# EAGLE board bij mekaar roopzol (EAGLE 5.00)
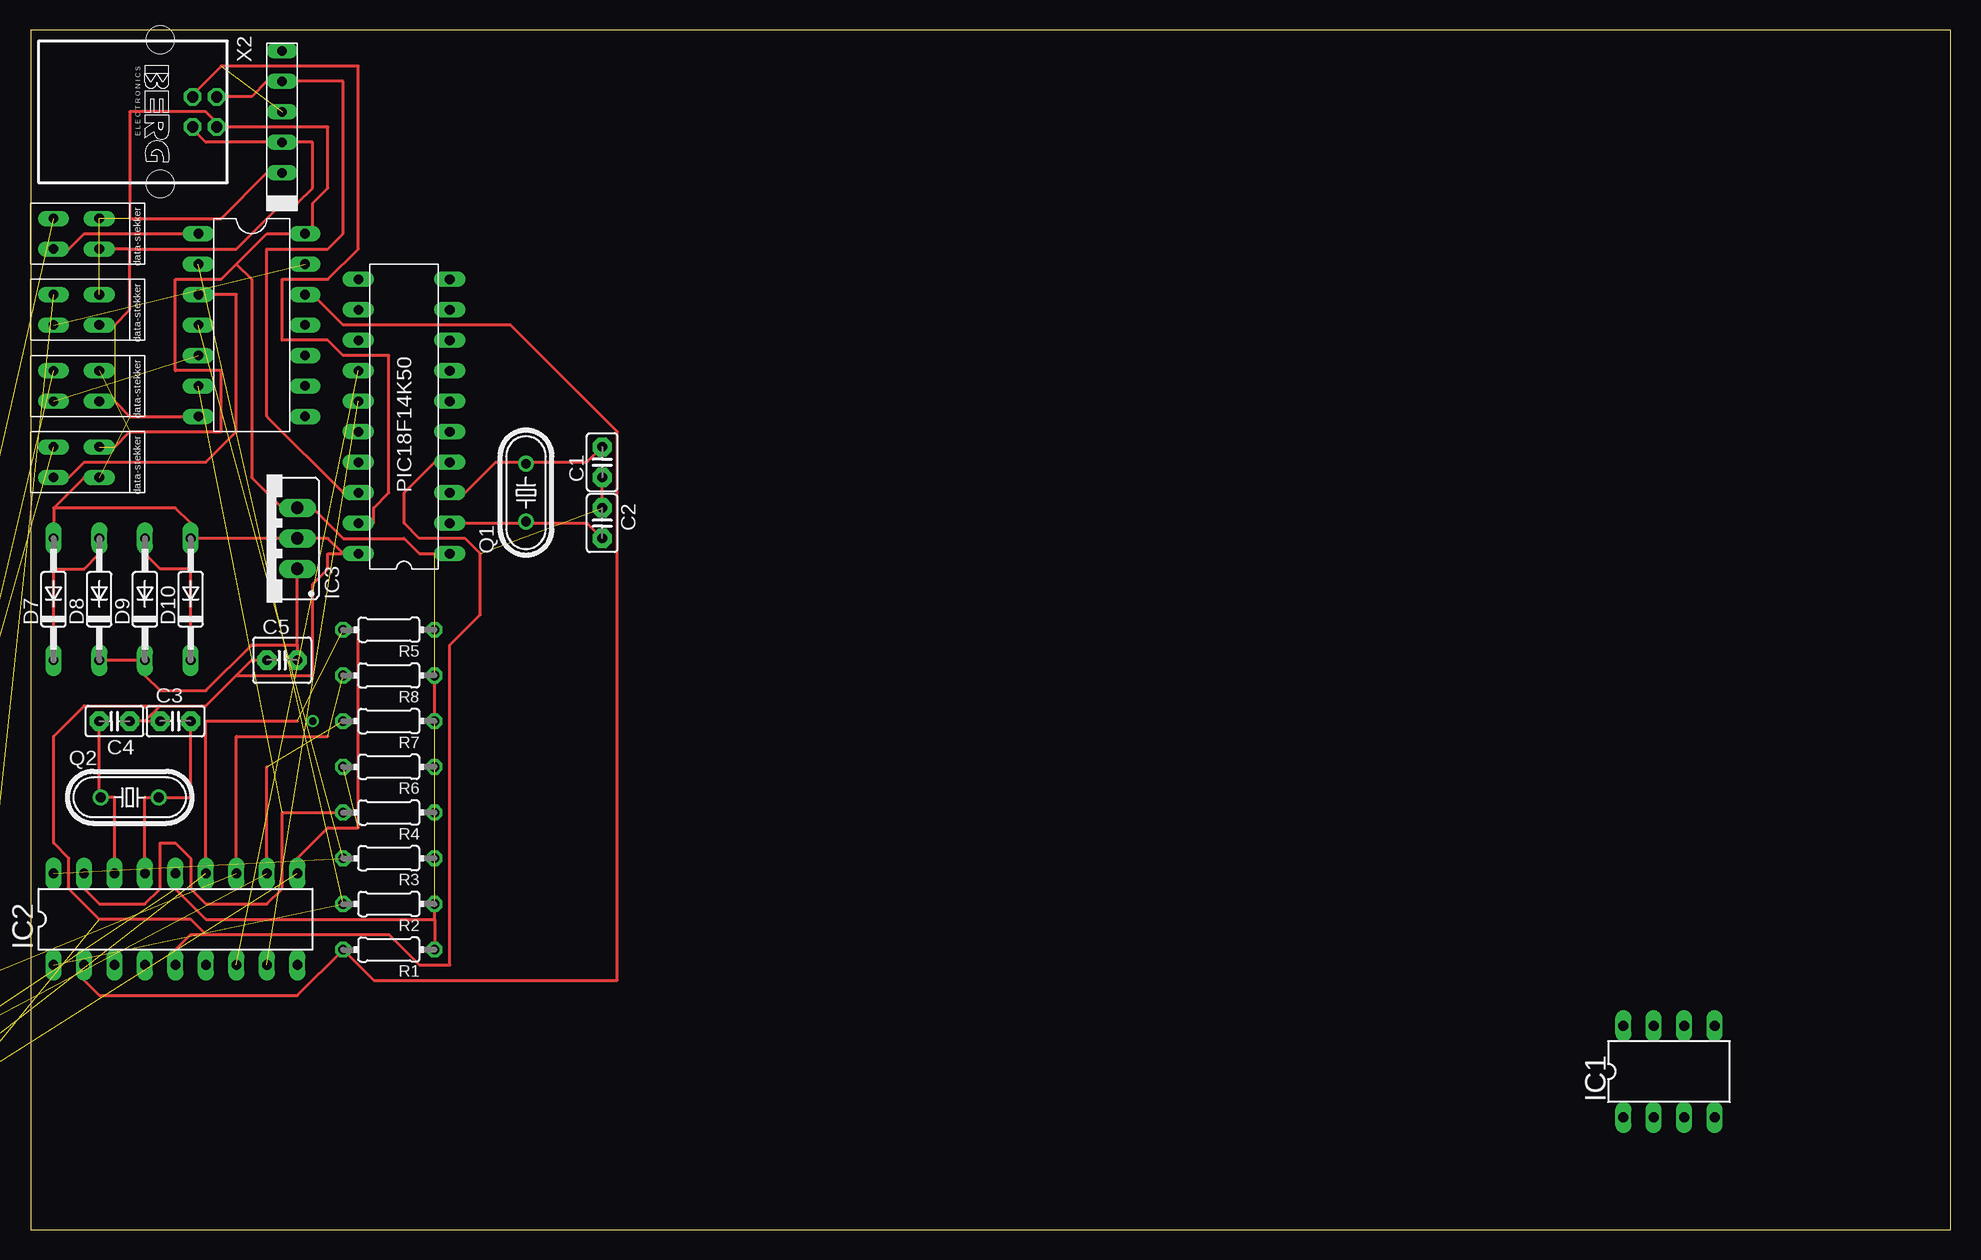
[diagram p0: board, top side]

Size 160 x 100 mm. Coordinates in mm from the lower left corner, seen from the top.
Outline: 0,0 160,0 160,100 0,100 0,0
Copper layers (1*16): Top 0.035mm / dielectric 1.5mm / Bottom 0.035mm
Design rules "default": minimum track width 10mil, minimum drill 24mil, track to track 8mil, track to pad 8mil, pad to pad 8mil, via to via 8mil, smd to smd 8mil, copper to edge 40mil, drill to drill 8mil, minimum pad ring 10mil, minimum via ring 8mil, stop-mask expansion 4mil, vias tented up to drill 0mil, thermal gap 10mil

## Footprints (pad centres in the part's own frame; a part is rotated, then mirrored left to right if it is on the bottom)
C2.5-2 = drill 0.813 pad 1.6 octagon: 1 -1.27,0; 2 1.27,0
C2.5-4 = drill 0.813 pad 1.6 octagon: 1 -1.27,0; 2 1.27,0
DO35-10 = drill 0.813 long: A 5.08,0; C -5.08,0
DIL8 = drill 0.813 long: 1 -3.81,-3.81; 2 -1.27,-3.81; 3 1.27,-3.81; 4 3.81,-3.81; 5 3.81,3.81; 6 1.27,3.81; 7 -1.27,3.81; 8 -3.81,3.81
DIL18 = drill 0.813 long: 1 -10.16,-3.81; 2 -7.62,-3.81; 3 -5.08,-3.81; 4 -2.54,-3.81; 5 0,-3.81; 6 2.54,-3.81; 7 5.08,-3.81; 8 7.62,-3.81; 9 10.16,-3.81; 10 10.16,3.81; 11 7.62,3.81; 12 5.08,3.81; 13 2.54,3.81; 14 0,3.81; 15 -2.54,3.81; 16 -5.08,3.81; 17 -7.62,3.81; 18 -10.16,3.81
78XXS = drill 1.016 long: GND 0,-2.54; IN -2.54,-2.54; OUT 2.54,-2.54
HC49/S = drill 0.813 round: 1 -2.413,0; 2 2.413,0
0204/7 = drill 0.813 octagon: 1 -3.81,0; 2 3.81,0
E.18F14K50 = drill 0.8 long: RA0/D+/PGD -7.62,3.81; RA1/D-/PGC -5.08,3.81; RA3/MCLR/VPP -2.54,-3.81; RA4/AN3/OSC2/CLKOUT -5.08,-3.81; RA5/OSC1/CLKIN -7.62,-3.81; RB4/AN10/SDI/SDA 7.62,3.81; RB5/AN11/RX/DT 10.16,3.81; RB6/SCK/SCL 12.7,3.81; RB7/TX/CK 12.7,-3.81; RC0/AN4/C12IN+/INT0/VREF+ 0,3.81; RC1/AN5/C12IN1-/INT1/VREF 2.54,3.81; RC2/AN6/P1D/C12IN2-/CVREF/INT2 5.08,3.81; RC3/AN7/P1C/C12IN3-/PGM 5.08,-3.81; RC4/P1B/C12OUT/SRQ 2.54,-3.81; RC5/CCP1/P1A/T0CKI 0,-3.81; RC6/AN8/SS/T13CKI/T1OSCI 7.62,-3.81; RC7/AN9/SDO/T1OSCO 10.16,-3.81; VDD -10.16,-3.81; VSS -10.16,3.81; VUSB -2.54,3.81
P.1.PICKIT-CONNECTOR = drill 0.8 long: 1 0,6.35; 2 0,3.81; 3 0,1.27; 4 0,-1.27; 5 0,-3.81; 6 0,-6.35
P-DIP = drill 0.8 long: RX -3.81,1.27; TX -3.81,-1.27; VDD 0,1.27; VSS 0,-1.27
P-DIP' = drill 0.8 long: 1A -5.715,7.62; 1Y -5.715,5.08; 2A -5.715,2.54; 2Y -5.715,0; 3A -5.715,-2.54; 3Y -5.715,-5.08; 4A 3.175,-5.08; 4Y 3.175,-7.62; 5A 3.175,0; 5Y 3.175,-2.54; 6A 3.175,5.08; 6Y 3.175,2.54; GND -5.715,-7.62; VCC 3.175,7.62
PN61729 = drill 0.95 octagon: 1 1.25,4.71; 2 -1.25,4.71; 3 -1.25,2.71; 4 1.25,2.71 | hole 2.3: -6.02,0; 6.02,0

## Placement (x,y rotation side)
C1  [C2.5-2]  47.62,63.97 90 top
C2  [C2.5-2]  47.62,58.89 270 top
C3  [C2.5-2]  12.06,42.38 0 top
C4  [C2.5-2]  6.98,42.38 180 top
C5  [C2.5-4]  20.95,47.46 0 top
D7  BA243A  [DO35-10]  1.9,52.54 90 top
D8  BA243A  [DO35-10]  5.71,52.54 90 top
D9  BA243A  [DO35-10]  9.52,52.54 90 top
D10  BA243A  [DO35-10]  13.33,52.54 90 top
IC1  PIC12F629P  [DIL8]  136.52,13.17 0 top
IC2  PIC16F628P  [DIL18]  12.06,25.87 0 top
IC3  [78XXS]  19.68,57.62 90 top
Q1  [HC49/S]  41.27,61.43 90 top
Q2  [HC49/S]  8.25,36.03 0 top
R1  [0204/7]  29.84,23.33 180 top
R2  [0204/7]  29.84,27.14 180 top
R3  [0204/7]  29.84,30.95 180 top
R4  [0204/7]  29.84,34.76 180 top
R5  [0204/7]  29.84,50 180 top
R6  [0204/7]  29.84,38.57 180 top
R7  [0204/7]  29.84,42.38 180 top
R8  [0204/7]  29.84,46.19 180 top
U$1  D.2.18F14K50  [E.18F14K50]  31.11,66.51 90 top
U$2  D.1.PICKIT-2-CONNECTOR  [P.1.PICKIT-CONNECTOR]  20.95,91.91 180 top
U$3  DATA-STEKKER  [P-DIP]  5.71,83.02 0 top
U$4  DATA-STEKKER  [P-DIP]  5.71,76.67 0 top
U$5  DATA-STEKKER  [P-DIP]  5.71,70.32 0 top
U$6  DATA-STEKKER  [P-DIP]  5.71,63.97 0 top
U$8  SN74LS14N  [P-DIP']  19.68,75.4 0 top
U$10  SN74LS14N  [P-DIP']  -8.26,9.36 0 top  (outside the outline)
X2  [PN61729]  10.79,93.18 270 top

## Library data of the parts
C1-C5 = capacitor-wima
D7-D10 = diode
IC1 IC2 = microchip
IC3 = v-reg
Q1 Q2 = crystal
R1-R8 = resistor
U$1 = pic18f14k50
U$2 = pickit-2-connector
U$3-U$6 = data-stekker
U$8 U$10 = synergy
X2 = con-berg

## Nets
N$1: U$1.RA1/D-/PGC U$2.5 X2.2
N$2: U$1.RA0/D+/PGD U$2.4 X2.3
N$3: U$3.RX U$10.1Y
N$4: D7.C D8.A
N$5: C5.2 D8.C D9.C IC3.IN
N$6: U$3.TX U$8.1A
N$7: U$6.TX U$8.2A
N$8: D9.A D10.C
N$9: C1.2 Q1.2 U$1.RA4/AN3/OSC2/CLKOUT
N$11: U$5.TX U$8.3A
N$12: C3.2 IC2.15 Q2.2
N$13: C4.2 IC2.16 Q2.1
N$14: IC2.8 U$1.RC1/AN5/C12IN1-/INT1/VREF
N$15: IC2.7 U$1.RC2/AN6/P1D/C12IN2-/CVREF/INT2
N$16: U$1.RC0/AN4/C12IN+/INT0/VREF+
N$17: C1.1 C2.1 C3.1 C4.1 C5.1 D7.A D10.A IC2.5 IC3.GND U$1.RA3/MCLR/VPP U$1.VSS U$2.1 U$2.3 U$3.VSS U$4.VSS U$5.VSS U$6.VSS U$8.GND U$10.GND X2.4
N$18: U$4.TX U$8.6A
N$19: IC2.17 R4.2 U$8.3Y
N$20: IC2.18 R3.2 U$8.2Y
N$21: IC2.1 R2.2 U$8.1Y
N$22: IC2.2 R1.2 U$8.6Y
N$23: IC2.13 R5.2 U$10.6A
N$24: IC2.10 R6.2 U$10.3A
N$25: U$6.RX U$10.2Y
N$26: U$5.RX U$10.3Y
N$27: U$4.RX U$10.6Y
N$28: C2.2 Q1.1 U$1.RA5/OSC1/CLKIN
N$29: IC2.12 R8.2 U$10.1A
N$30: IC2.11 R7.2 U$10.2A
N$33: IC2.14 IC3.OUT R1.1 R2.1 R4.1 R5.1 R6.1 R7.1 R8.1 U$1.VDD U$2.2 U$3.VDD U$4.VDD U$5.VDD U$6.VDD U$8.VCC U$10.VCC X2.1
VDD: IC1.1
VSS: IC1.8

## Tracks (layer width: path | path; a pad name or v marks a point on that pad's centre or on a via)
N$1
  Top 0.254: X2.2 15.87,94.45 18.41,94.45 19.68,95.72 U$2.5 26.03,95.72 26.03,83.02 24.76,81.75 19.68,81.75 19.68,67.78 26.03,61.43 U$1.RA1/D-/PGC
N$2  (1 unrouted)
  Top 0.254: U$1.RA0/D+/PGD 28.57,58.89 28.57,60.16 29.84,61.43 29.84,72.86 26.03,72.86 24.76,74.13 20.95,74.13 20.95,79.21 24.76,79.21 27.3,81.75 27.3,96.99 15.87,96.99 13.33,94.45 X2.3
N$3  (1 unrouted)
N$4
  Top 0.254: D7.C 1.9,55.08 4.44,55.08 5.71,56.35 D8.A
N$5
  Top 0.254: D8.C D9.C 9.52,46.19 10.79,44.92 14.6,44.92 18.41,48.73 22.22,48.73 | 22.22,48.73 C5.2 | 22.22,48.73 IC3.IN
N$6
  Top 0.254: U$3.TX 3.17,81.75 4.44,83.02 U$8.1A
N$7
  Top 0.254: U$6.TX 3.17,62.7 4.44,63.97 14.6,63.97 17.14,66.51 17.14,77.94 U$8.2A
N$8
  Top 0.254: D10.C 13.33,55.08 10.79,55.08 9.52,56.35 D9.A
N$9
  Top 0.254: 41.27,63.97 38.73,63.97 36.19,61.43 U$1.RA4/AN3/OSC2/CLKOUT | C1.2 46.35,63.97 41.27,63.97 | 41.27,63.97 Q1.2
N$10  (via drill 0.6)
  other vias: 23.49,42.38
N$11  (1 unrouted)
N$12
  Top 0.254: IC2.15 9.52,36.03 Q2.2 13.33,36.03 C3.2
N$13
  Top 0.254: IC2.16 6.98,36.03 Q2.1 5.71,36.03 C4.2
N$14  (1 unrouted)
N$15  (1 unrouted)
N$17  (4 unrouted)
  Top 0.254: C2.1 C1.1 | 9.52,42.38 C3.1 | 9.52,42.38 C4.1 | C5.1 18.41,47.46 17.14,46.19 | 17.14,46.19 14.6,43.65 10.79,43.65 | 10.79,43.65 9.52,42.38 | 1.9,60.16 4.44,62.7 U$6.VSS | 1.9,60.16 D7.A | 26.03,56.35 24.76,57.62 IC3.GND D10.A 13.33,58.89 12.06,60.16 1.9,60.16 | 17.14,46.19 23.49,46.19 23.49,53.81 24.76,55.08 24.76,56.35 26.03,56.35 | 26.03,56.35 U$1.VSS | 14.6,24.6 13.33,24.6 12.06,23.33 IC2.5 | 14.6,24.6 29.84,24.6 32.38,22.06 34.92,22.06 34.92,48.73 37.46,51.27 37.46,56.35 36.19,57.62 32.38,57.62 31.11,58.89 31.11,61.43 33.65,63.97 U$1.RA3/MCLR/VPP | 10.79,43.65 4.44,43.65 1.9,41.11 1.9,32.22 3.17,30.95 3.17,28.41 5.71,25.87 13.33,25.87 14.6,24.6 | 8.25,81.75 8.25,76.67 6.98,75.4 U$4.VSS | 8.25,81.75 U$3.VSS | X2.4 13.33,91.91 14.6,90.64 U$2.3 23.49,90.64 23.49,86.83 22.22,85.56 U$2.1 17.14,81.75 8.25,81.75 | U$5.VSS 6.98,69.05 8.25,67.78 U$8.GND
N$18  (1 unrouted)
N$19  (1 unrouted)
  Top 0.254: R4.2 20.95,34.76 20.95,28.41 19.68,27.14 14.6,27.14 13.33,28.41 13.33,30.95 12.06,32.22 10.79,32.22 10.79,28.41 9.52,27.14 5.71,27.14 4.44,28.41 IC2.17
N$20  (2 unrouted)
N$21  (2 unrouted)
N$22
  Top 0.254: U$8.6Y 23.49,77.94 26.03,75.4 40,75.4 48.89,66.51 48.89,20.79 28.57,20.79 R1.2 22.22,19.52 5.71,19.52 4.44,20.79 IC2.2
N$23  (2 unrouted)
  Top 0.254: 22.22,42.38 14.6,42.38 IC2.13
N$24  (2 unrouted)
  Top 0.254: 27.3,50 27.3,33.49 24.76,33.49 22.22,30.95 IC2.10
N$25  (1 unrouted)
N$26  (1 unrouted)
N$27  (1 unrouted)
N$28
  Top 0.254: U$1.RA5/OSC1/CLKIN 41.27,58.89 | C2.2 46.35,58.89 41.27,58.89 | 41.27,58.89 Q1.1
N$29  (2 unrouted)
  Top 0.254: 24.76,41.11 17.14,41.11 IC2.12
N$30  (2 unrouted)
  Top 0.254: IC2.11 19.68,38.57
N$33  (10 unrouted)
  Top 0.254: R7.1 R8.1 | U$1.VDD 33.65,56.35 32.38,56.35 31.11,57.62 26.03,57.62 23.49,60.16 IC3.OUT 20.95,60.16 18.41,62.7 18.41,79.21 17.14,80.48 | 33.65,25.87 R2.1 | 33.65,25.87 R1.1 | 33.65,25.87 14.6,25.87 12.06,28.41 IC2.14 | U$2.2 19.68,88.1 15.87,84.29 8.25,84.29 8.25,93.18 14.6,93.18 15.87,91.91 | 6.98,65.24 8.25,66.51 15.87,66.51 15.87,71.59 12.06,71.59 12.06,79.21 15.87,79.21 17.14,80.48 | 15.87,91.91 24.76,91.91 24.76,86.83 23.49,85.56 23.49,83.02 U$8.VCC 19.68,83.02 17.14,80.48 | 15.87,91.91 X2.1